# Altium PCB PRJCTPCB2.PcbDoc
Units mil, origin at the board's own origin, x right, y up, seen from the top; angles counter-clockwise.
Board outline 6000 x 4000 mil, 2 copper layers (Top Layer, Bottom Layer); 2 components, 4 nets, 13 pads, 0 vias.
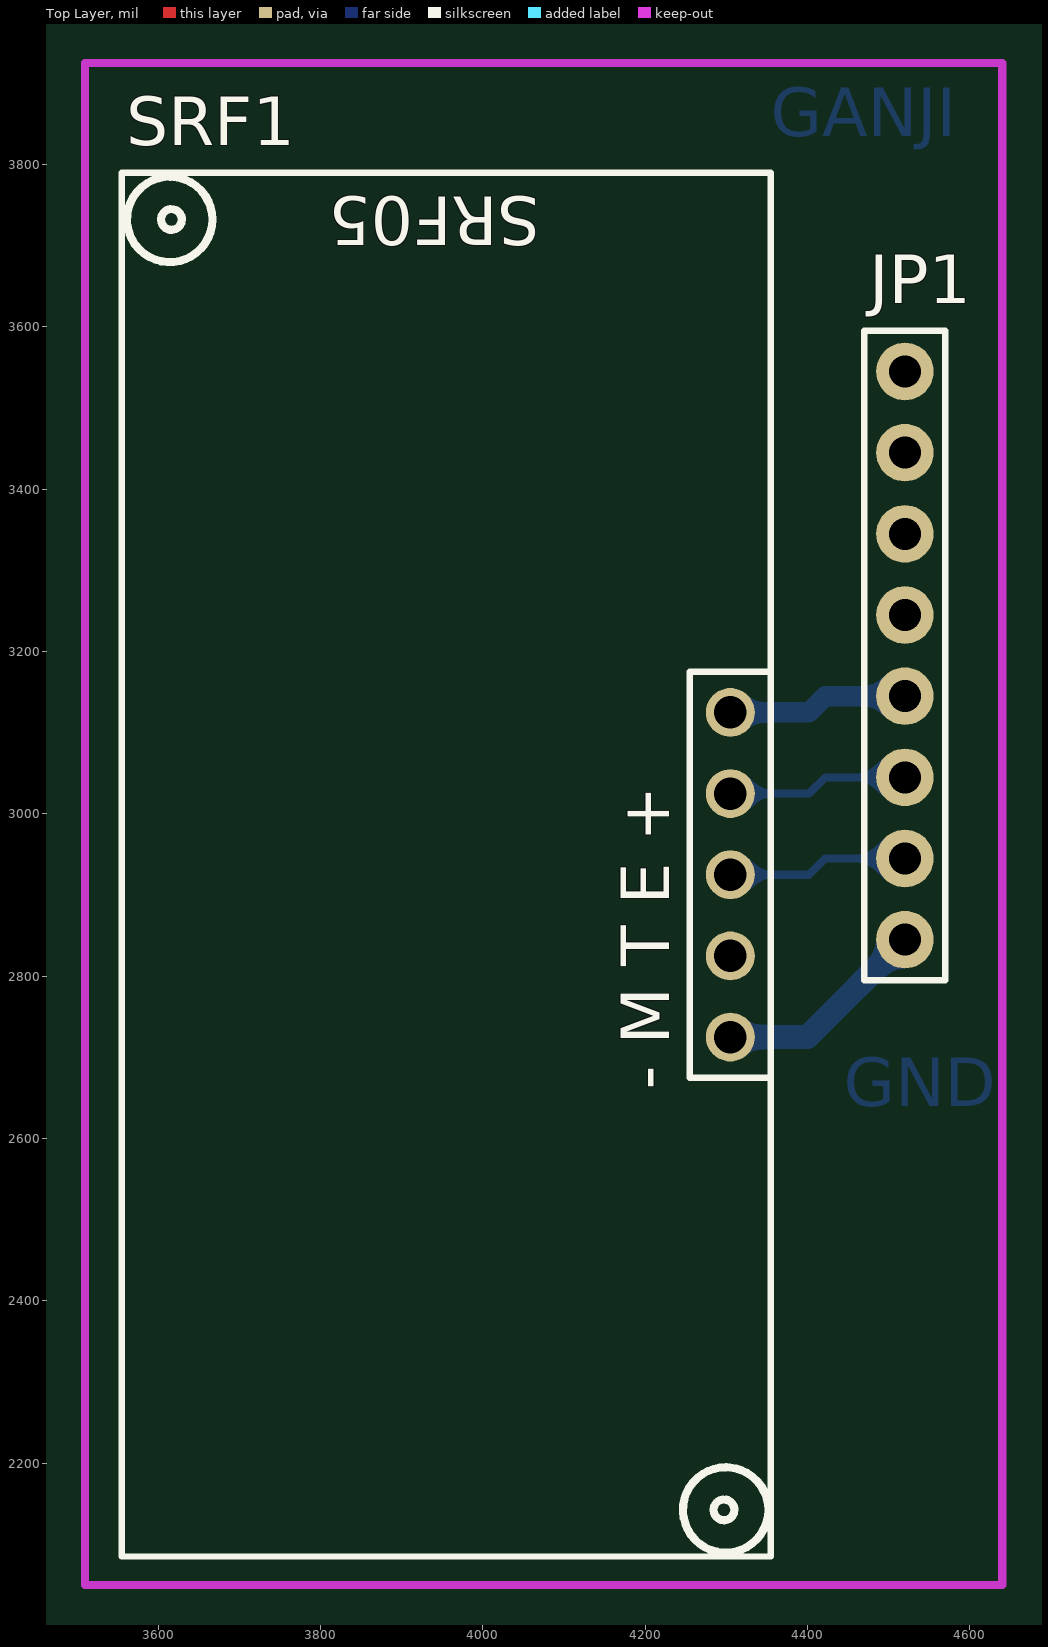
[diagram p0: Top Layer view]
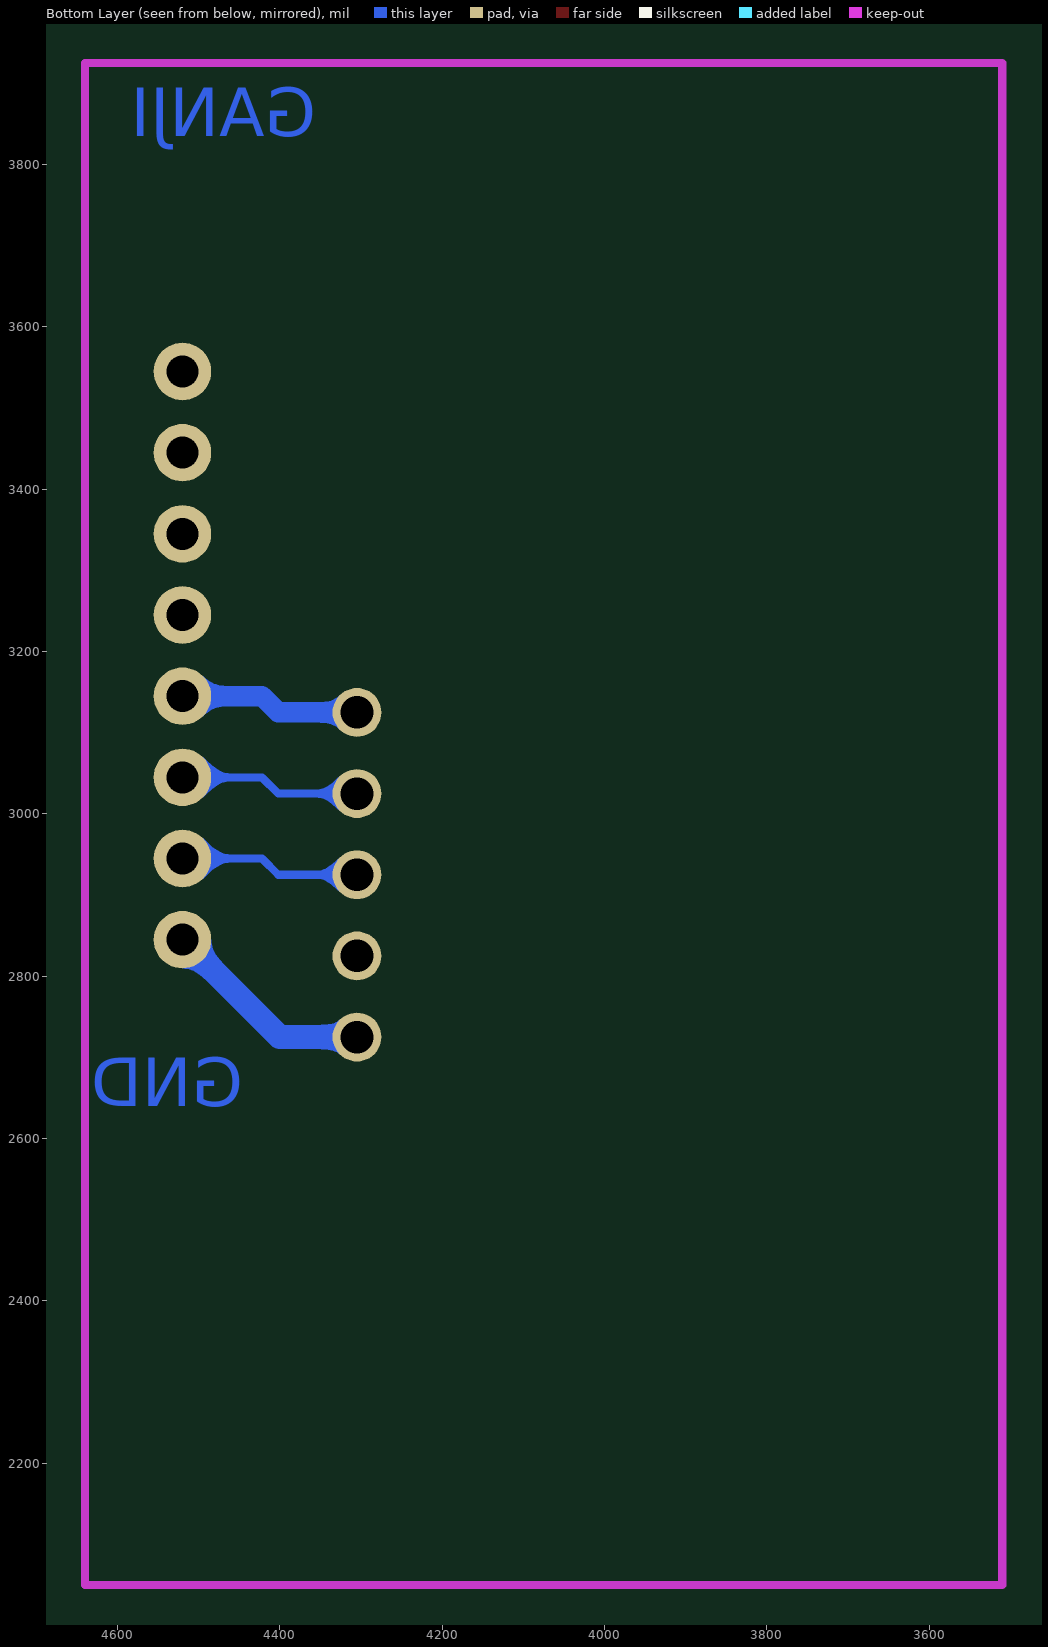
[diagram p1: Bottom Layer view, seen from below]

## Layer stack, top to bottom
Top Solder: solder mask 0.4, Solder Resist, Dk 3.5
Top Layer: signal copper 1.4
Dielectric 1: dielectric 12.6, FR-4, Dk 4.8
Bottom Layer: signal copper 1.4
Bottom Solder: solder mask 0.4, Solder Resist, Dk 3.5

## Board outline
1000,1000 7000,1000 7000,5000 1000,5000

## Design rules (kind name [scope] priority, off if disabled: settings)
Clearance [All] p1: gap=10 ignorepadtopadclearanceinfootprint=FALSE except(0: Arc-Hole Track-Hole SMDPad-Hole THPad-Hole Via-Hole Fill-Hole Poly-Hole Region-Hole Text-Hole; 12: Arc-Arc Arc-Track Track-Track)
PolygonConnect [All] p1: connectstyle=Relief reliefconductorwidth=10 reliefentries=4 polygonreliefangle="90 Angle" airgapwidth=10
RoutingLayers [All] p1: top layer_v5=FALSE bottom layer_v5=TRUE
RoutingVias [All] p1: holewidth=28 width=50 viastyle="Through Hole" minholewidth=28 minwidth=50 maxholewidth=28 maxwidth=50
SilkToSolderMaskClearance [IsText] p1: minsilkscreentomaskgap=10 clearancetoexposedcopper=TRUE
SolderMaskExpansion [All] p1: expansion=4 istentingtop=FALSE
Width Width_2 [InNetClass('GND')] p1: maxlimit=30 minlimit=30 preferedwidth=30
Width Width_1 [InNetClass('VCC')] p2: maxlimit=25 minlimit=25 preferedwidth=25
Width [InNetClass('Other')] p3: maxlimit=10 minlimit=10 preferedwidth=10
28 further rules are at their usual default settings.

## Components (designator, comment, footprint, x,y, rotation, side; value= is the part's Value field where it differs from the comment)
JP1 "Header 8" HDR1X8 4520,2845 r90 top
SRF1 "SRF05" SRF05 4305,2135 r90 top

## Footprints (in the part's own frame and the unit in brackets; to place one, negate y for a bottom-side part, rotate by r counter-clockwise, add the part's x,y. Pads: shape width x height; smd on the part's side, far side on the other; paste and mask are expansions set on the pad)
HDR1X8 [mm]
  round 1.8 hole 1: 1(0,0) 2(2.54,0) 3(5.08,0) 4(7.62,0) 5(10.16,0) 6(12.7,0) 7(15.24,0) 8(17.78,0)
  silkscreen extent -1.27,-1.27 19.05,1.27
SRF05 [mm] "Connector; Header; 5 Position"
  round 1.53 hole 1.02: 1(25.146,0) 2(22.606,0) 3(20.066,0) 4(17.526,0) 5(14.986,0)
  silkscreen extent -1.27,-1.27 42.04,19.05

## Part data
JP1: "Header, 8-Pin", Publisher="Altium Limited", Revision="17-Jul-2002: Re-released for DXP Platform."
SRF1: "SRF05 - Ultra-Sonic Ranger", Designer="Seyed Mohsen ghasemian", WEB=www.picpars.com

## Nets (pads, with @x,y where several pads share a name; then routed paths per layer and width w, separated by ;. In a path a pad name is that pad's centre, name@x,y a point inside that pad or via, vN(x,y) a via of type N, cw(c..) or ccw(c..) an arc to the next point about the centre after c; other vN are vias at no path point)
NetJP1_1: JP1.1 SRF1.5 | length 264.7
  Bottom Layer w30: SRF1.5 4400,2725 JP1.1
NetJP1_2: JP1.2 SRF1.3 | length 223.3
  Bottom Layer w10: SRF1.3 4402,2925 4422,2945 JP1.2
NetJP1_3: JP1.3 SRF1.2 | length 223.3
  Bottom Layer w10: SRF1.2 4402,3025 4422,3045 JP1.3
NetJP1_4: JP1.4 SRF1.1 | length 223.3
  Bottom Layer w25: SRF1.1 4402,3125 4422,3145 JP1.4
pads on no net: JP1.5 JP1.6 JP1.7 JP1.8 SRF1.4

## Keep-outs
Keep-Out Layer:
  lines w10: 3510,2050 3510,2060 3510,3925 4640,3925 4640,2050 3510,2050

## Other copper
Bottom Layer:
  text "GANJI" at 4355,3835 h60
  text "GND" at 4445,2640 h60

## Silkscreen, mask and mechanical layers (free items; w line width, h text height)
Mechanical 1:
  lines w10: 3510,2060 3510,3925 4640,3925 4640,2050 3520,2050 3510,2060

## Text inside footprints (layer, text, board x,y; h text height)
SRF1: Top Overlay "- M T E +" at 4230,2660 h60 r90